# Altium PCB Multivibrator.PcbDoc
Units mm, origin at the board's own origin, x right, y up, seen from the top; angles counter-clockwise.
Board outline 30 x 30 mm, 2 copper layers (Top Layer, Bottom Layer); 9 components, 6 nets, 20 pads, 1 vias.
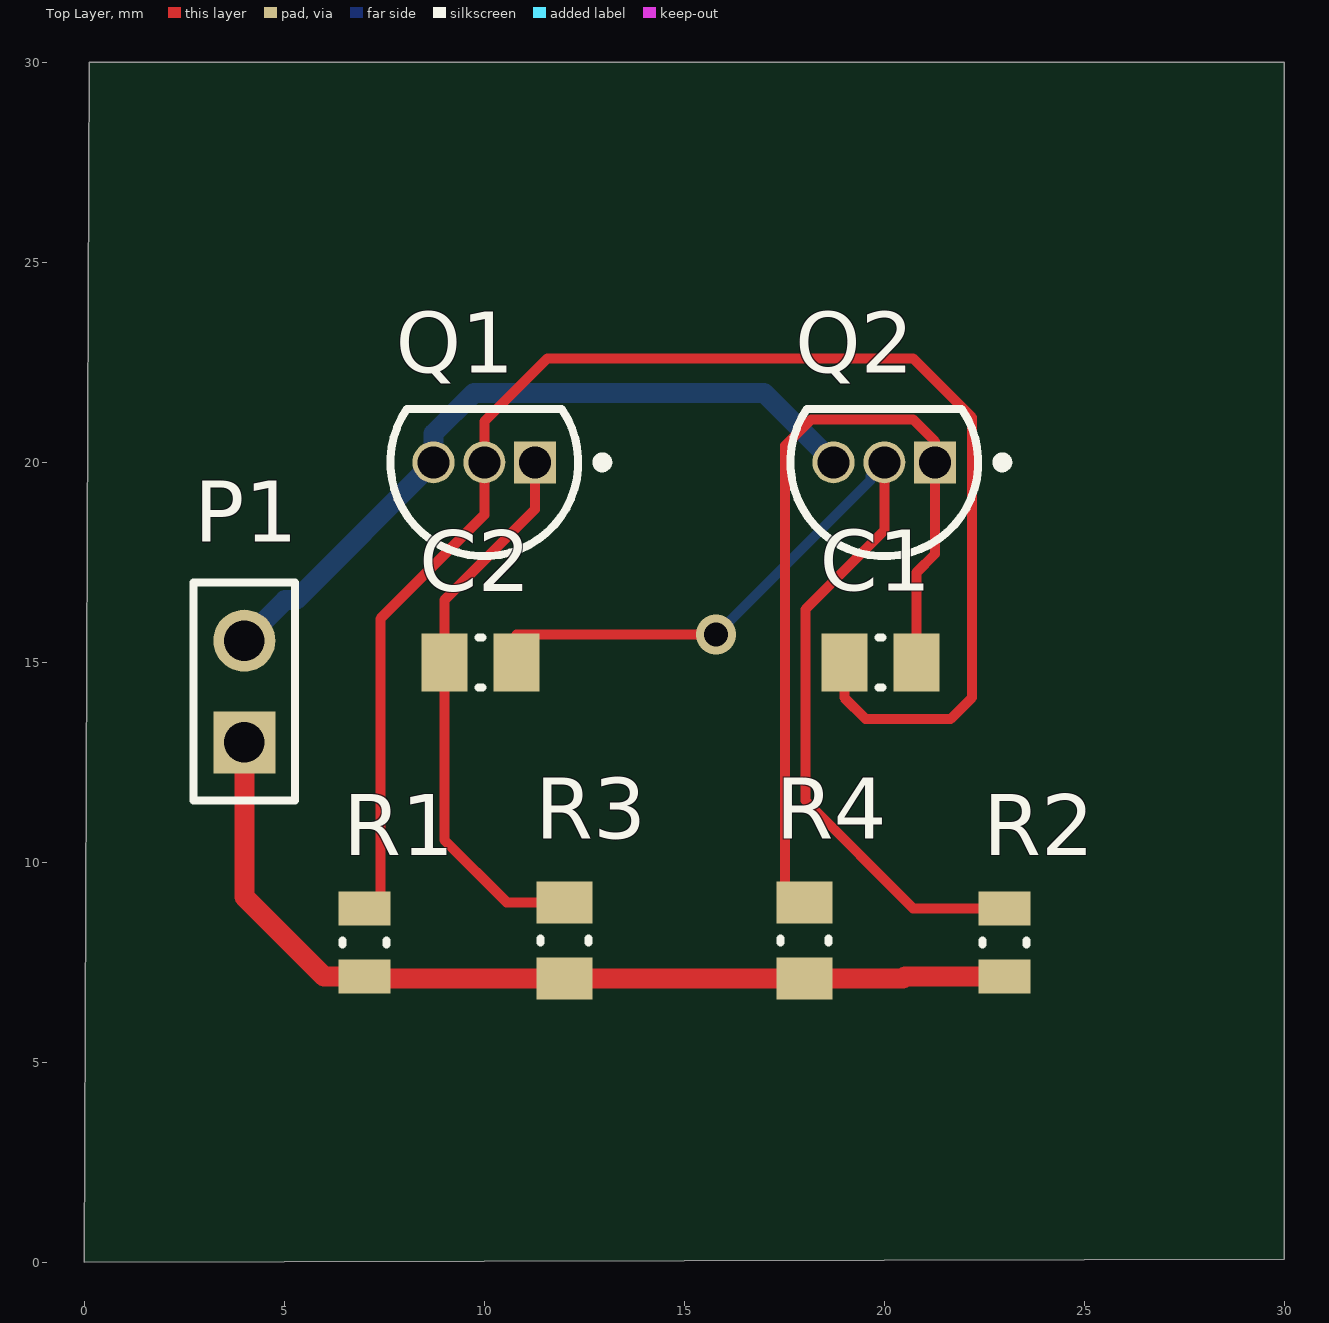
[diagram p0: Top Layer view]
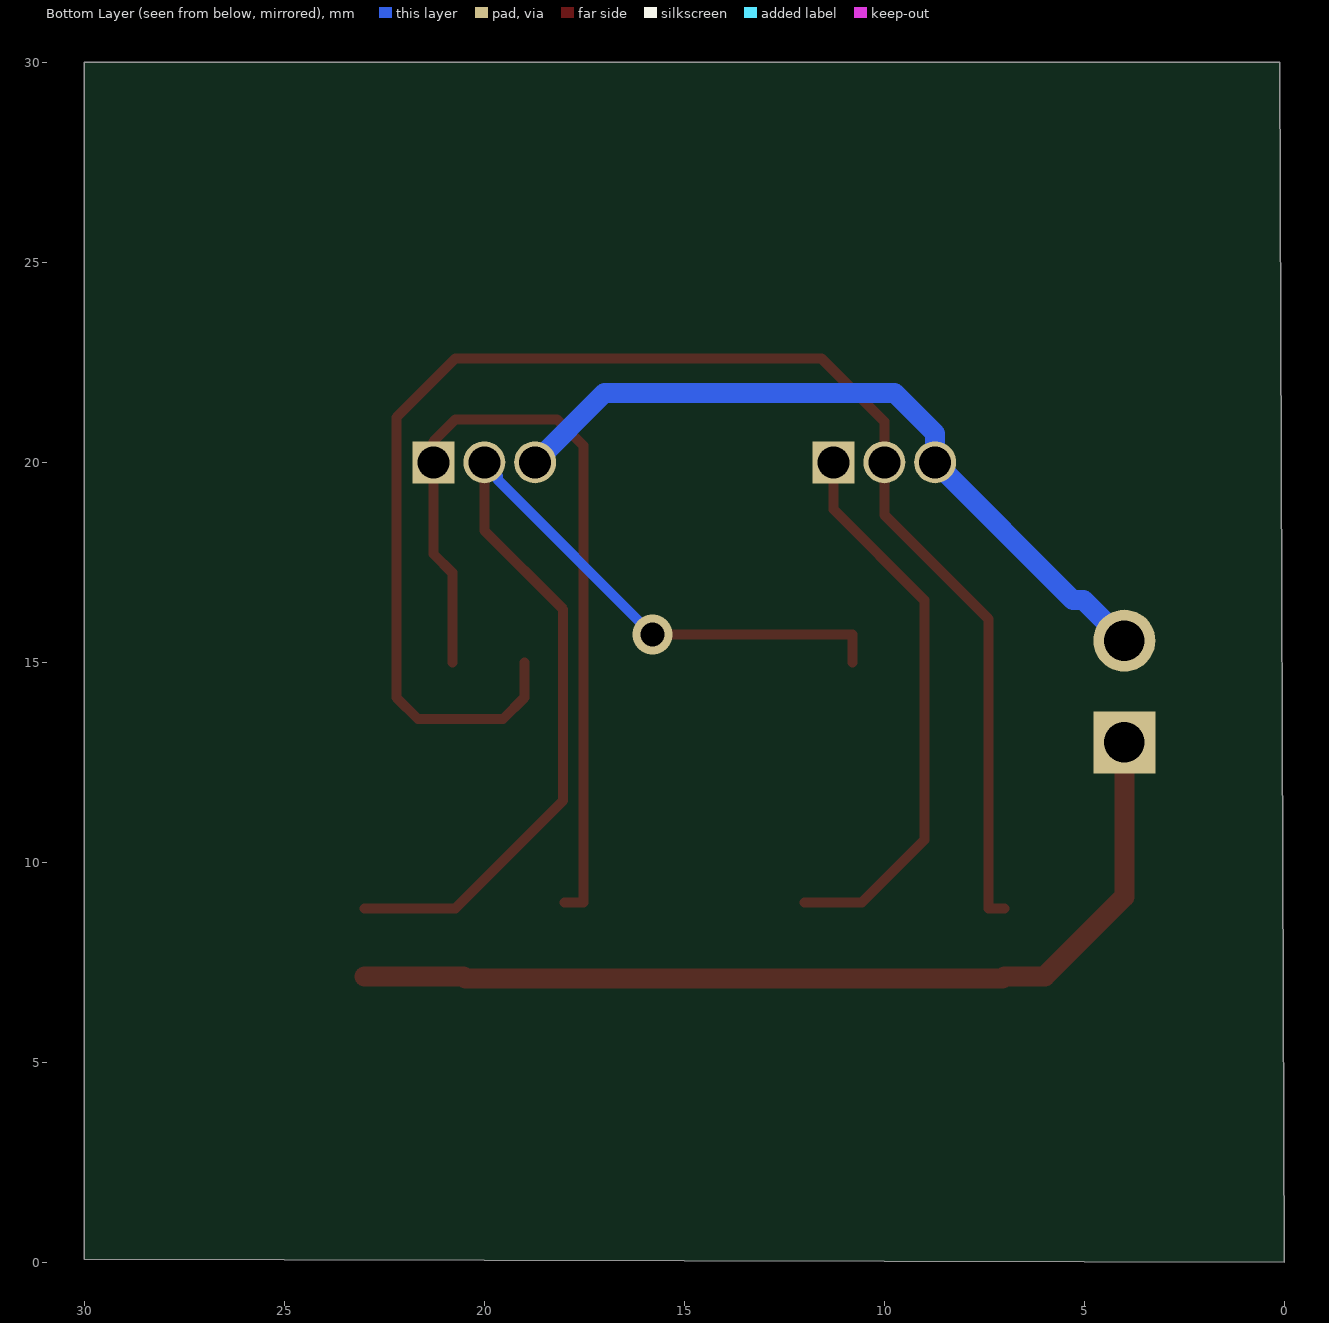
[diagram p1: Bottom Layer view, seen from below]

## Layer stack, top to bottom
Top Solder: solder mask 0.0102, Solder Resist, Dk 3.5
Top Layer: signal copper 0.0356
Dielectric 1: dielectric 0.32, FR-4, Dk 4.8
Bottom Layer: signal copper 0.0356
Bottom Solder: solder mask 0.0102, Solder Resist, Dk 3.5

## Board outline
0,0 30,0.079 30,30 0.118,30

## Design rules (kind name [scope] priority, off if disabled: settings)
Clearance [All] p1: gap=0.25
PolygonConnect [All] p1: connectstyle=Relief reliefconductorwidth=0.254 reliefentries=4 polygonreliefangle="90 Angle" airgapwidth=0.254
RoutingVias [All] p1: holewidth=0.6 width=1 viastyle="Through Hole" minholewidth=0.6 minwidth=1 maxholewidth=0.6 maxwidth=1
SolderMaskExpansion [All] p1: expansion=0.102
Width Width_Power [(InNet('12V') OR InNet('GND'))] p1: maxlimit=0.5 minlimit=0.25 preferedwidth=0.5 minimp=50.000000 maximp=50.000000 favimp=50.000000
Width [All] p2: maxlimit=0.25 minlimit=0.25 preferedwidth=0.25 minimp=50.000000 maximp=50.000000 favimp=50.000000
30 further rules are at their usual default settings.

## Components (designator, comment, footprint, x,y, rotation, side; value= is the part's Value field where it differs from the comment)
C1 "CAP 22nF 16V 0805(2012)" CAPC0805(2012)145_N 19.9,15 r0 top
C2 "CAP 22nF 16V 0805(2012)" CAPC0805(2012)145_N 9.9,15 r0 top
P1 "TSW-102-26-G-S" SMTC-TSW-102-26-XX-S 4,13 r90 top
Q1 "BC547C" ONSC-TO-92-3-29-11 10,20 r180 top
Q2 "BC547C" ONSC-TO-92-3-29-11 20,20 r180 top
R1 "100K 5% 0805(2012)" RESC0805(2012)_L 7,8 r270 top
R2 "100K 5% 0805(2012)" RESC0805(2012)_L 23,8 r270 top
R3 "1K 5% 0805(2012)" RESC0805(2012)_N 12,8.05 r270 top
R4 "1K 5% 0805(2012)" RESC0805(2012)_N 18,8.05 r270 top

## Footprints (in the part's own frame and the unit in brackets; to place one, negate y for a bottom-side part, rotate by r counter-clockwise, add the part's x,y. Pads: shape width x height; smd on the part's side, far side on the other; paste and mask are expansions set on the pad)
CAPC0805(2012)145_N [mm] "Chip Capacitor, Body 2.0x1.2mm, Height 1.45mm, IPC Medium Density"
  rect 1.15x1.45 smd: 1(-0.9,0) 2(0.9,0)
  silkscreen extent -0.05,-0.63 0.05,0.63, body extent -1.1,-0.72 1.1,0.73, height 1.45
ONSC-TO-92-3-29-11 [mm] "TO, 3-Leads, Body Dia 4.7mm, Pitch 1.27mm"
  rect 1.05x1.05 hole 0.8: 1(-1.27,0)
  round 1.05 hole 0.8: 2(0,0) 3(1.27,0)
  silkscreen extent -3.08,-1.34 2.35,2.35, body extent -2.35,-1.33 2.36,2.36, height 7.87
RESC0805(2012)_L [mm] "Chip Resistor, Body 2.0x1.3mm, IPC High Density"
  rect 0.85x1.3 smd: 1(-0.85,0) 2(0.85,0)
  silkscreen extent -0.05,-0.55 0.05,0.55, body extent -1.1,-0.67 1.1,0.68, height 0.7
RESC0805(2012)_N [mm] "Chip Resistor, Body 2.0x1.3mm, IPC Medium Density"
  rect 1.05x1.4 smd: 1(-0.95,0) 2(0.95,0)
  silkscreen extent -0.05,-0.6 0.05,0.6, body extent -1.1,-0.67 1.1,0.68, height 0.7
SMTC-TSW-102-26-XX-S [mm] ".025 SQ Post Terminal Strip Assembly, 1x2 Pins, Vertical, 2.54mm Pitch, Male"
  rect 1.55x1.55 hole 1.02: 1(0,0)
  round 1.55 hole 1.02: 2(2.54,0)
  silkscreen extent -1.46,-1.27 4,1.27, body extent -1.4,-1.27 3.81,1.27, height 8.38

## Part data
C1 C2: library part CMP-1036-04042-1, "CAP 22nF 16V ±10% 0805 (2012 Metric) Thickness 1.45mm SMD"
P1: library part CMP-1024-00327-1, "0.025\" SQ Post Header, Through-hole, Vertical, -55 to 125 degC, 2.54 mm Pitch, 2-Pin, Male, RoHS"
Q1 Q2: library part CMP-1048-01437-1, "Amplifier Transistor, NPN Silicon, 3-Pin TO-92, Bulk Box"
R1 R2: library part CMP-1013-00122-1, "100K 0.125W 5% 0805 (2012 Metric)  SMD"
R3 R4: library part CMP-1013-00074-1, "1K 0.125W 5% 0805 (2012 Metric)  SMD"

## Via types
v1: diameter 1, hole 0.6, Top Layer to Bottom Layer, 1 vias

## Nets (pads, with @x,y where several pads share a name; then routed paths per layer and width w, separated by ;. In a path a pad name is that pad's centre, name@x,y a point inside that pad or via, vN(x,y) a via of type N, cw(c..) or ccw(c..) an arc to the next point about the centre after c; other vN are vias at no path point)
12V: P1.1 R1.2 R2.2 R3.2 R4.2 | length 23.7
  Top Layer w0.5: P1.1 4,9.138 5.988,7.15 R1.2 7.05,7.1 R3.2 R4.2 20.466,7.1 20.516,7.15 R2.2
GND: P1.2 Q1.3 Q2.3 | length 18.4
  Bottom Layer w0.5: P1.2 5.014,16.554 5.284,16.554 Q1.3 8.73,20.72 9.746,21.736 16.994,21.736 Q2.3
NetC1_1: C1.1 Q1.2 R1.1 | length 38.6
  Top Layer w0.25: R1.1 7.4,8.85 7.4,16.088 10,18.688 Q1.2 10,21.024 11.576,22.6 20.72,22.6 22.193,21.126 22.193,14.116 21.66,13.583 19.533,13.583 19,14.116 C1.1
NetC1_2: C1.2 Q2.1 R4.1 | length 21.9
  Top Layer w0.25: R4.1 17.52,9 17.52,20.415 18.18,21.076 20.72,21.076 21.27,20.526 Q2.1 21.27,17.71 20.8,17.24 C1.2
NetC2_1: C2.1 Q1.1 R3.1 | length 14
  Top Layer w0.25: Q1.1 11.27,18.824 9,16.554 C2.1 9,10.56 10.56,9 R3.1
NetC2_2: C2.2 Q2.2 R2.1 | length 27.1
  Top Layer w0.25: C2.2 10.8,15.691 v1(15.792,15.691) ; Q2.2 20,18.298 18.028,16.326 18.028,11.542 20.72,8.85 R2.1
  Bottom Layer w0.25: v1(15.792,15.691) 19.653,19.552 19.653,19.653 Q2.2